# Altium PCB SmartKey_v2.PcbDoc
Units mm, origin at the board's own origin, x right, y up, seen from the top; angles counter-clockwise.
Board outline 60 x 60 mm, 2 copper layers (Top Layer, Bottom Layer); 43 components, 22 nets, 125 pads, 92 vias.
Unrouted connection lines stored in the file: 24.
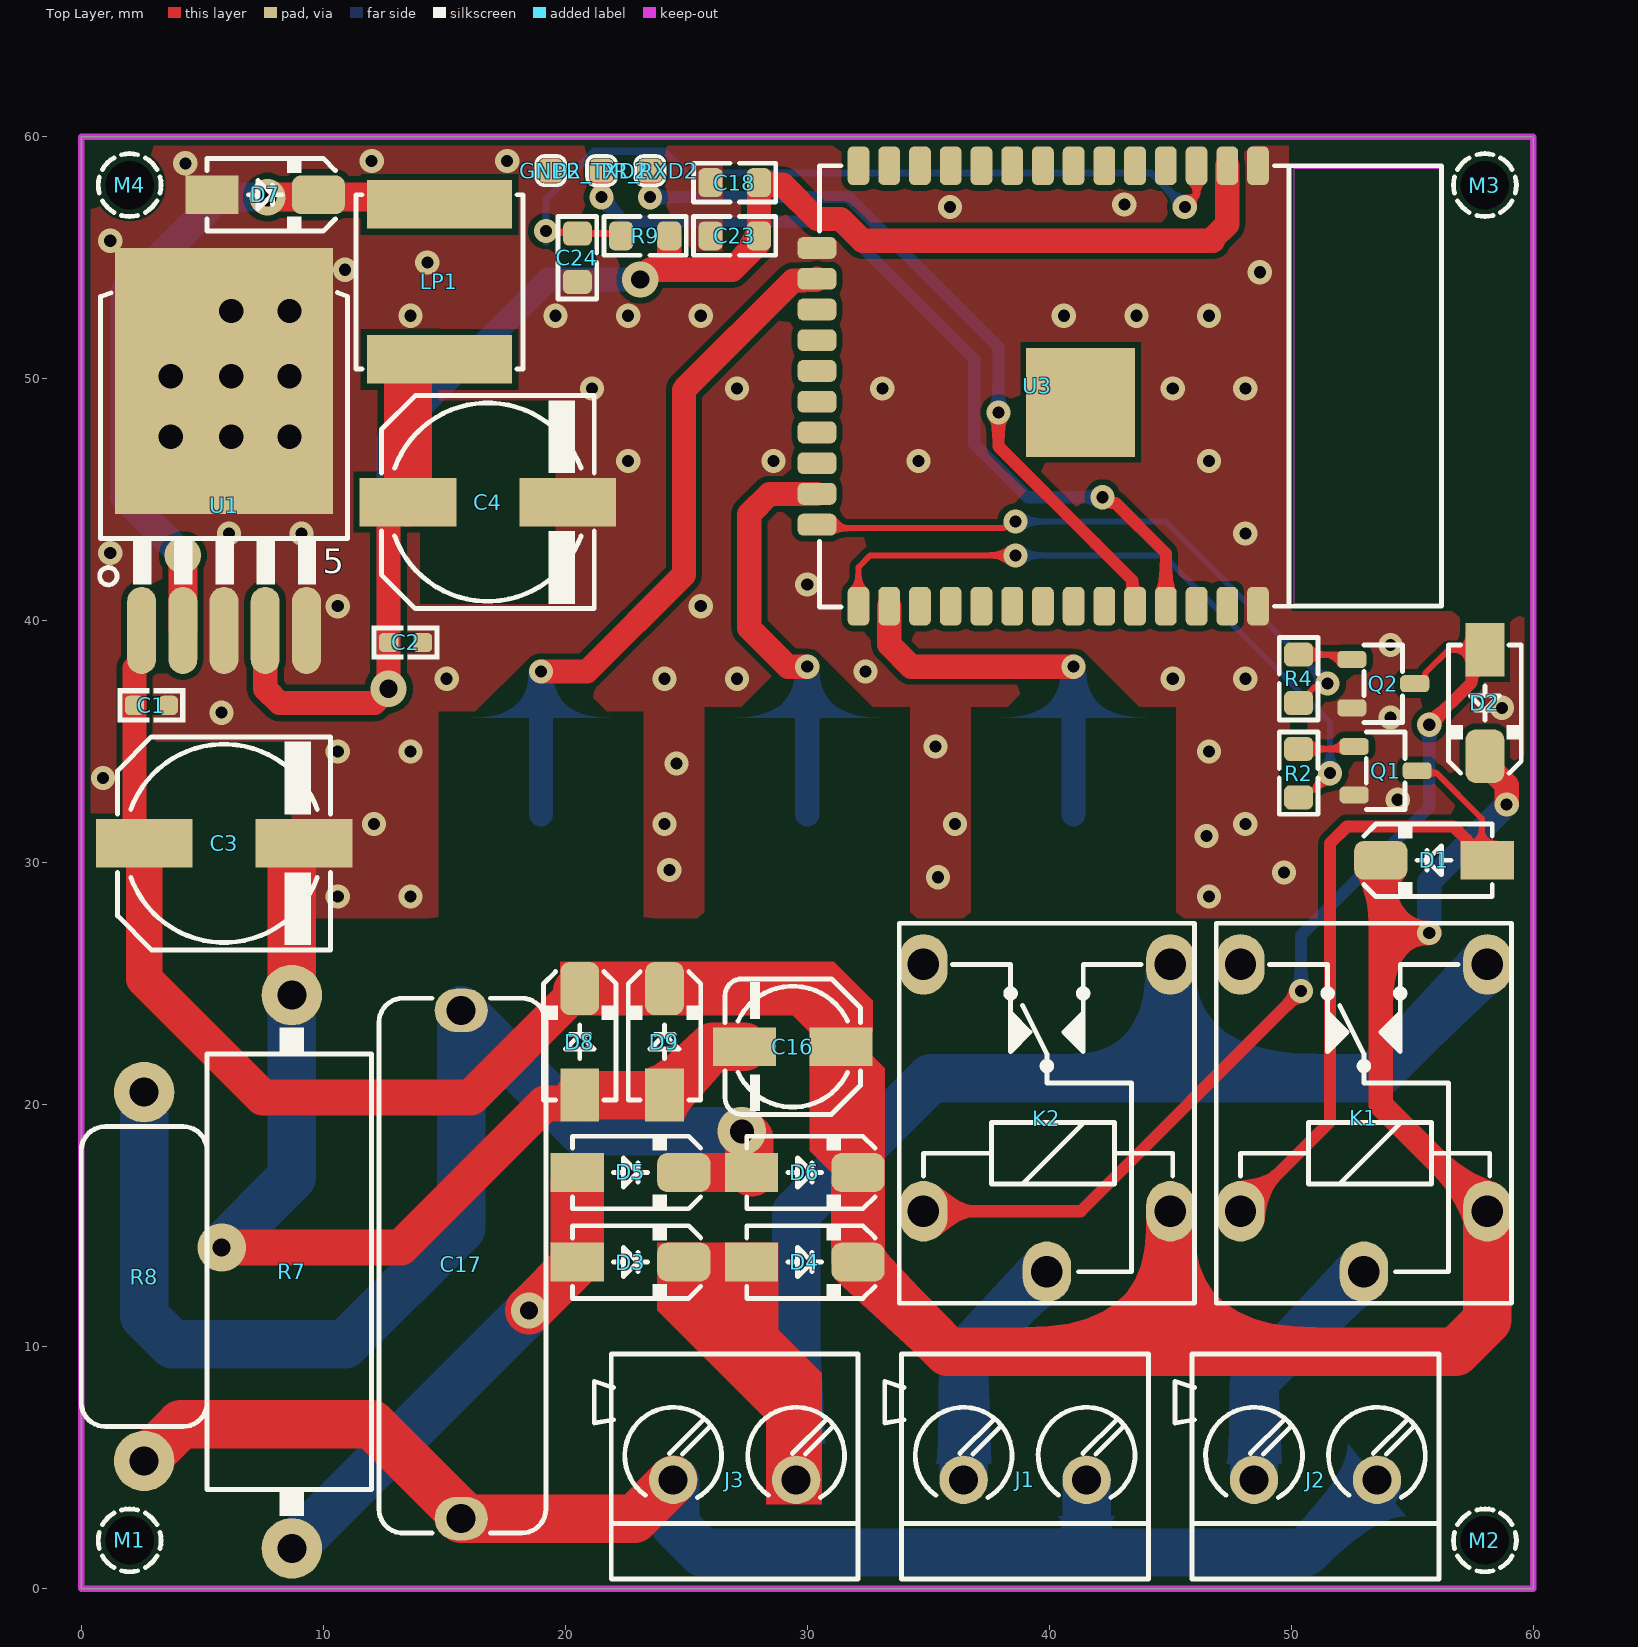
[diagram p0: Top Layer view]
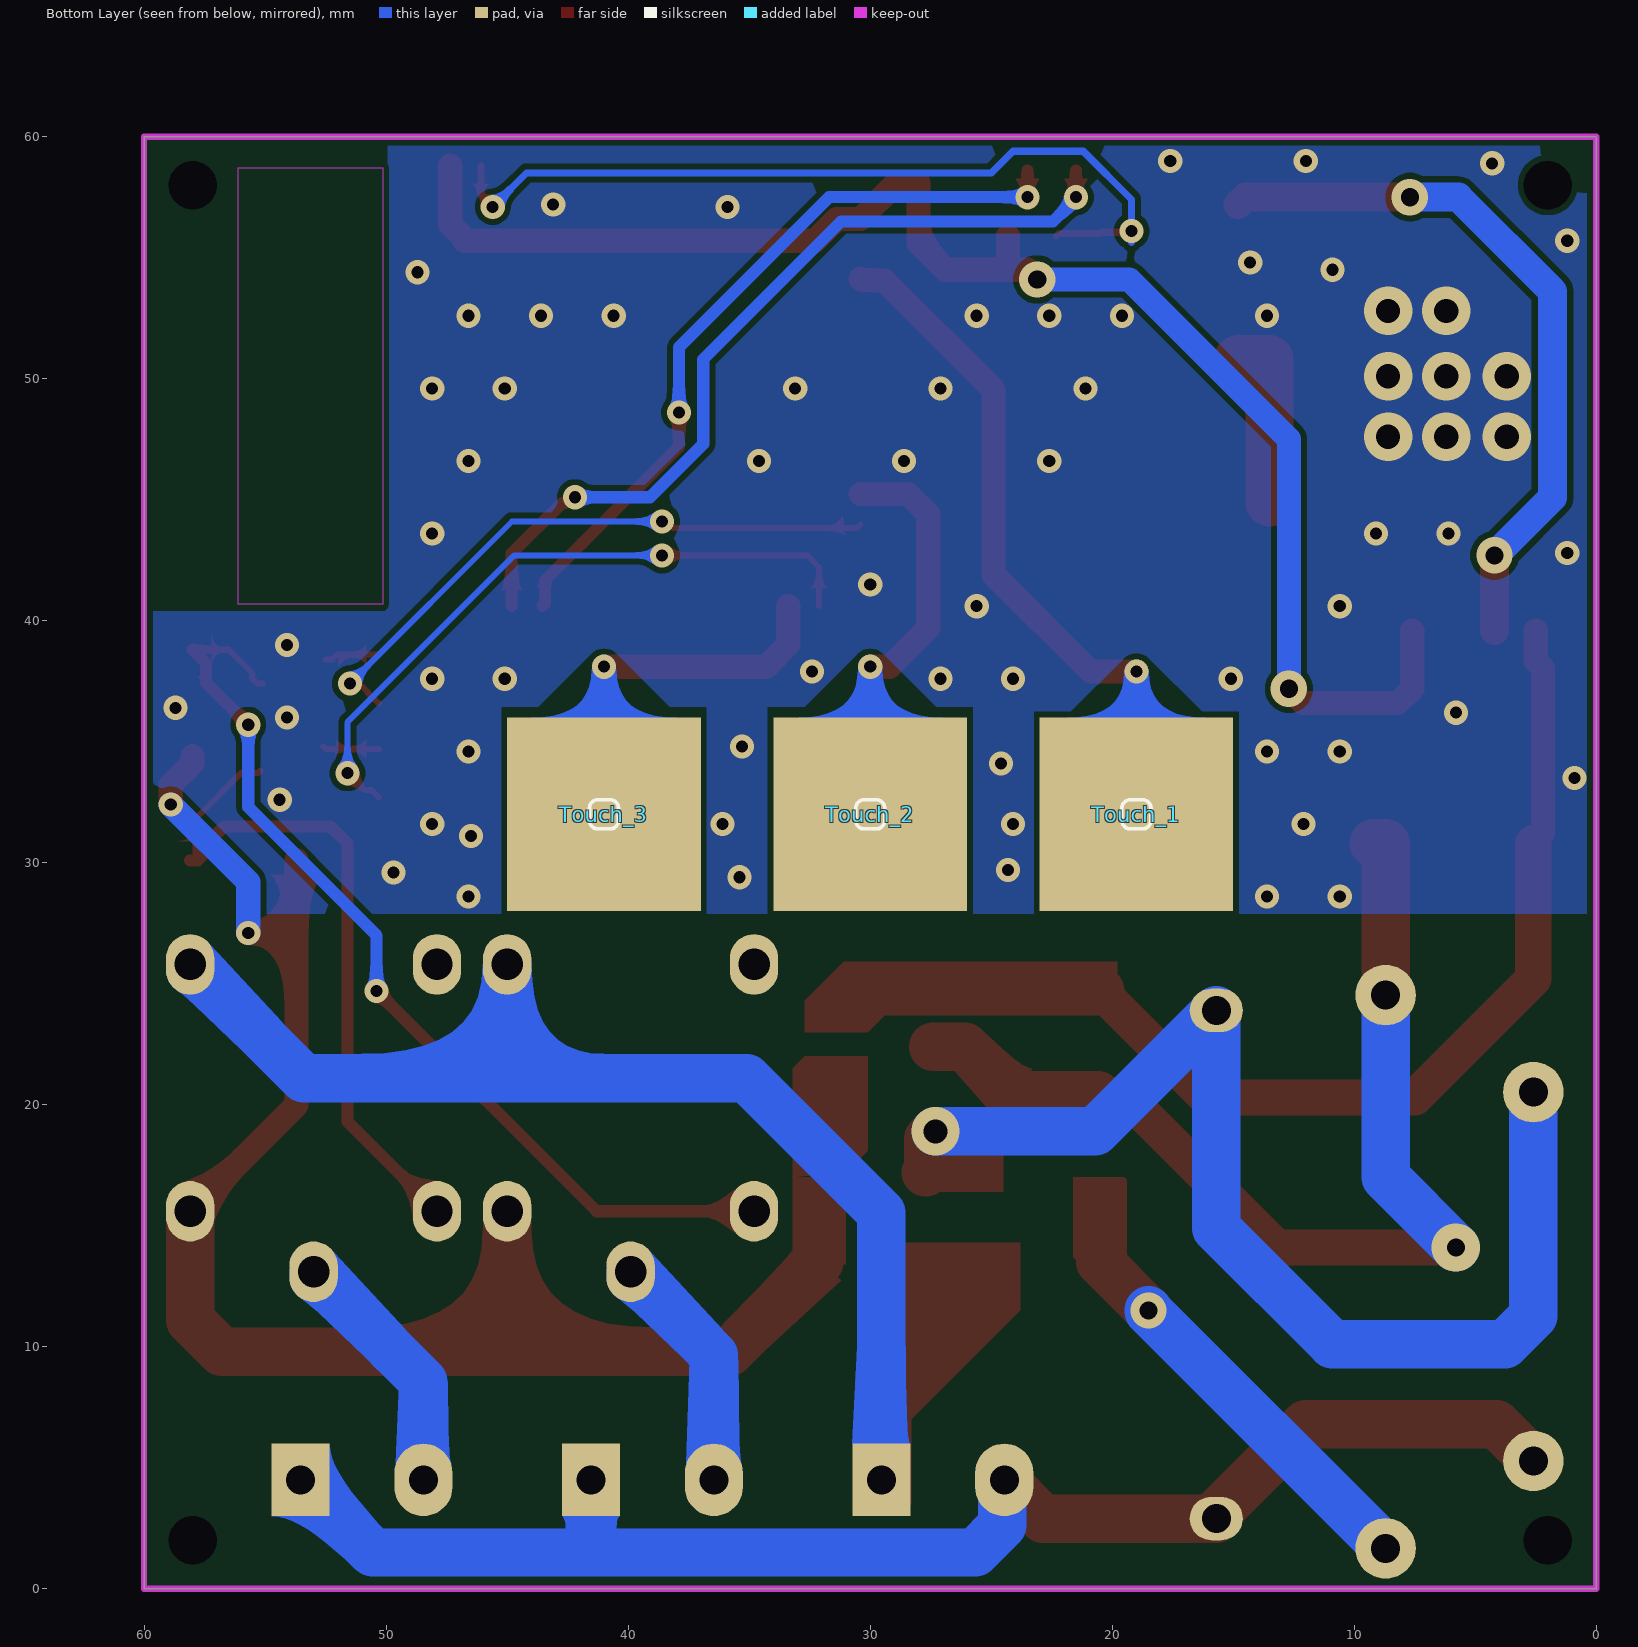
[diagram p1: Bottom Layer view, seen from below]
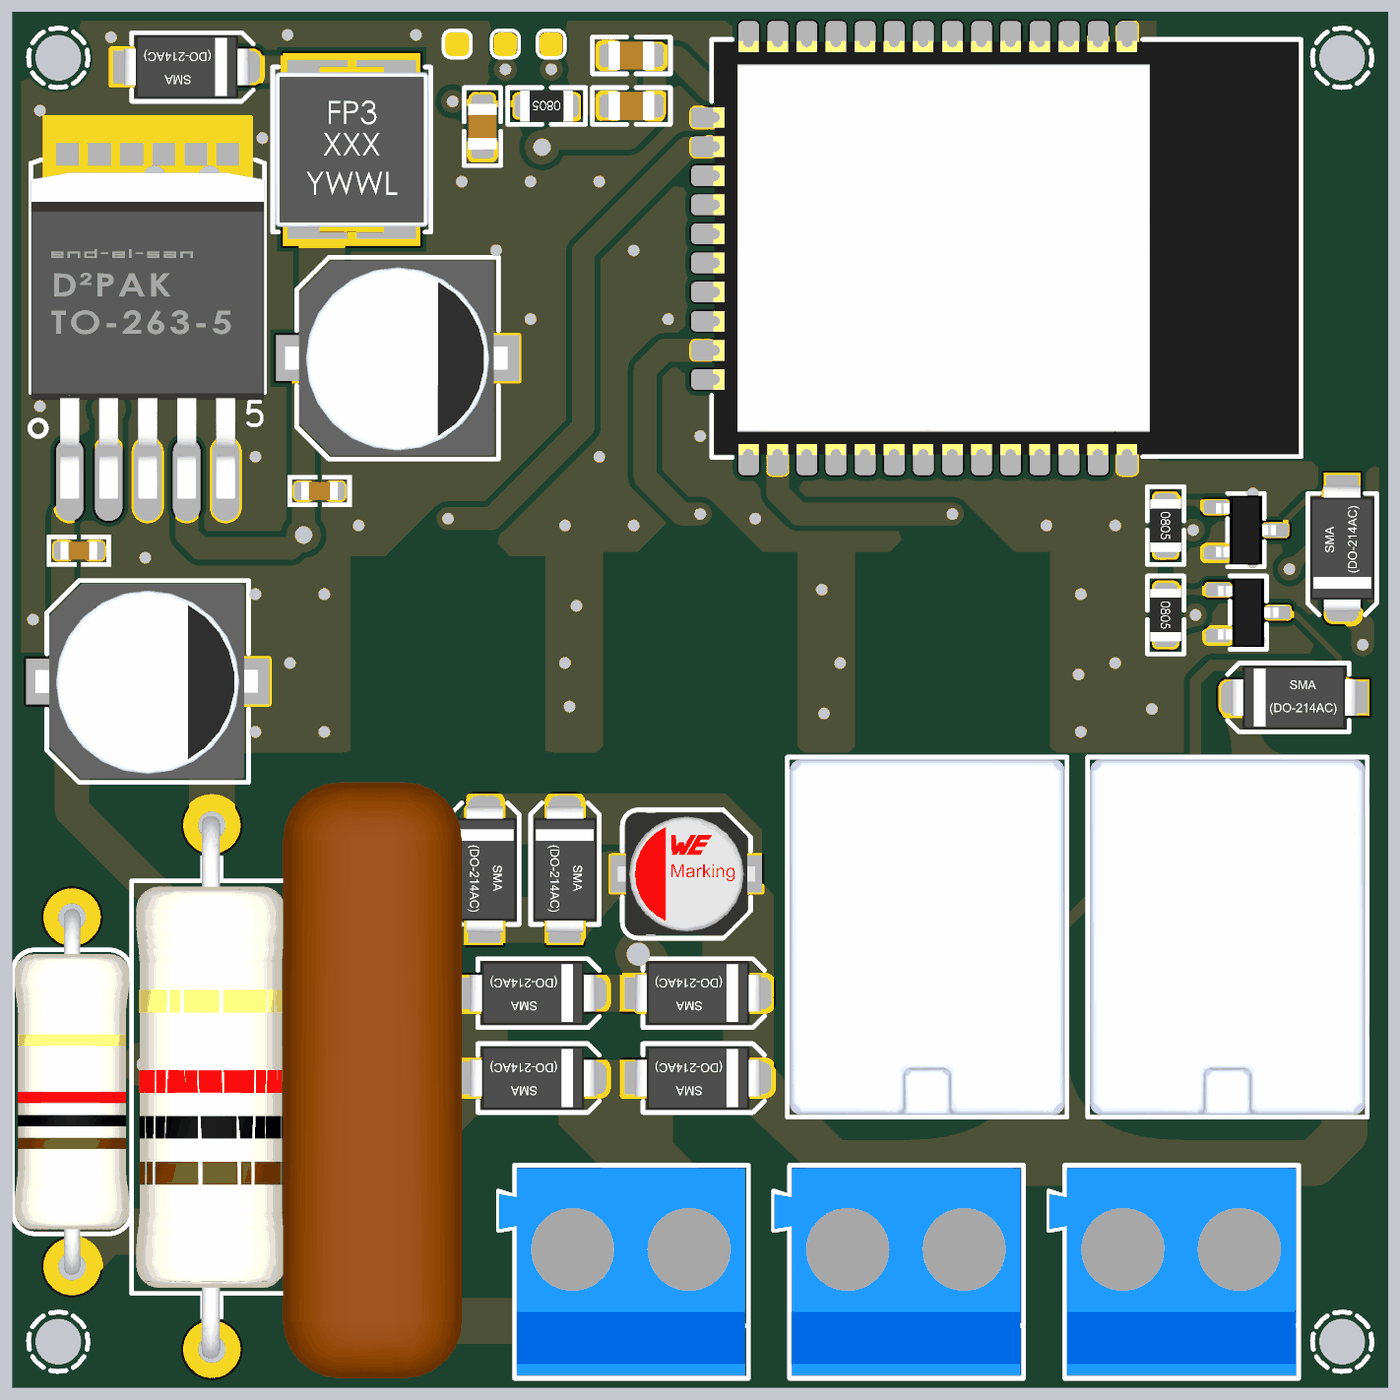
[diagram p2: 3D render of the assembled board from above, using the file's embedded part models]

## Layer stack, top to bottom
Top Solder: solder mask 0.0102, Solder Resist, Dk 3.5
Top Layer: signal copper 0.0356
Dielectric 1: dielectric 0.32, FR-4, Dk 4.8
Bottom Layer: signal copper 0.0356
Bottom Solder: solder mask 0.0102, Solder Resist, Dk 3.5

## Board outline
0,0 60,0 60,60 0,60

## Design rules (kind name [scope] priority, off if disabled: settings)
Clearance [All] p1: gap=0.25 ignorepadtopadclearanceinfootprint=FALSE
DiffPairsRouting [All] p1: maxlimit=0.3 minlimit=0.2 mostfreqgap=0.3 toplayer_minwidth=0.2 toplayer_maxwidth=0.3 toplayer_prefwidth=0.3 bottomlayer_minwidth=0.2 bottomlayer_maxwidth=0.3 bottomlayer_prefwidth=0.3 maxuncoupledlength=12.7
HoleSize [All] p1: absolutevalues=TRUE maxlimit=10 minlimit=0.5 maxpercent=80.000 minpercent=20.000
HoleToHoleClearance [All] p1: gap=0.3 allowstackedmicrovias=TRUE
PlaneClearance [All] p1: clearance=0.3
PlaneConnect [All] p1: pad.planeconnectstyle=Relief pad.reliefexpansion=0.5 pad.reliefentries=4 pad.reliefconductorwidth=0.4 pad.reliefairgap=0.3 via.planeconnectstyle=Direct via.reliefexpansion=0.5 via.reliefentries=4 via.reliefconductorwidth=0.4 via.reliefairgap=0.3
PolygonConnect PolygonConnect_Via [All vs IsVia] p1: connectstyle=Direct reliefconductorwidth=0.254 reliefentries=4 polygonreliefangle="90 Angle" airgapwidth=0.254
PolygonConnect PolygonConnect_Pad [All] p2: thpad.connectstyle=Relief thpad.reliefconductorwidth=0.4 thpad.reliefentries=4 thpad.polygonreliefangle="90 Angle" thpad.airgapwidth=0.3 smdpad.connectstyle=Direct smdpad.reliefconductorwidth=0.4 smdpad.reliefentries=4 smdpad.polygonreliefangle="90 Angle" smdpad.airgapwidth=0.3 via.connectstyle=Relief via.reliefconductorwidth=0.4 via.reliefentries=4 via.polygonreliefangle="90 Angle" via.airgapwidth=0.3
RoutingVias [All] p1: holewidth=0.5 width=1 viastyle="Through Hole" minholewidth=0.5 minwidth=1 maxholewidth=5 maxwidth=10
SolderMaskExpansion [All] p1: expansion=0.102 istentingtop=FALSE
Width [All] p1: maxlimit=10 minlimit=0.25 preferedwidth=0.25
25 further rules are at their usual default settings.

## Components (designator, comment, footprint, x,y, rotation, side; value= is the part's Value field where it differs from the comment)
C1 "100nF" C0603 2.9,36.5 r0 top
C2 "100nF" C0603 13.4,39.1 r0 top
C3 "470uF" C_EL_8 5.9,30.8 r0 top
C4 "470uF" C_EL_8 16.8,44.9 r0 top
C16 "47uF" C_EL_5 29.4,22.4 r180 top
C17 "1uF/400V" C_PLY_22X7 15.7,13.4 r90 top
C18 "10uF" C0805 27,58.1 r0 top
C23 "10uF" C0805 27,55.9 r0 top
C24 "1uF" C0805 20.5,55 r270 top
D1 "1N4007" D_SMA 55.9,30.1 r180 top
D2 "1N4007" D_SMA 58,36.6 r270 top
D3 "1N4007" D_SMA 22.7,13.5 r0 top
D4 "1N4007" D_SMA 29.9,13.5 r0 top
D5 "1N4007" D_SMA 22.7,17.2 r0 top
D6 "1N4007" D_SMA 29.9,17.2 r0 top
D7 "1N5822" D_SMA 7.6,57.6 r0 top
D8 "ZENER24V0" D_SMA 20.6,22.6 r90 top
D9 "ZENER24V0" D_SMA 24.1,22.6 r90 top
GND2 "TESTPOINT_SMD" TPSMD_S1#1 19.4,58.6 r90 top value=VALUE
J1 "CONN_TB2" TBB_2 39,4.5 r180 top locked
J2 "CONN_TB2" TBB_2 51,4.5 r180 top locked
J3 "CONN_TB2" TBB_2 27,4.5 r180 top locked
K1 "RELAY_SPDT" REL_SPDT_5_1512 53,15.6 r180 top
K2 "RELAY_SPDT" REL_SPDT_5_1512 39.9,15.6 r180 top
LP1 "3.3uH" L_7 14.8,54 r270 top
M1 "DNP/MH" PSPMH2 2,2 r0 top locked
M2 "DNP/MH" PSPMH2 58,2 r0 top locked
M3 "DNP/MH" PSPMH2 58,58 r0 top locked
M4 "DNP/MH" PSPMH2 2,58 r0 top locked
PR_RXD2 "TESTPOINT_SMD" TPSMD_S1#1 23.5,58.6 r90 top value=VALUE
PR_TXD2 "TESTPOINT_SMD" TPSMD_S1#1 21.5,58.6 r90 top value=VALUE
Q1 "C945" SOT23_3 53.9,33.8 r0 top
Q2 "C945" SOT23_3 53.8,37.4 r0 top
R2 "1K" R0805 50.3,33.7 r270 top
R4 "1K" R0805 50.3,37.6 r270 top
R7 "68R" R3W_AX09 8.7,13.1 r270 top
R8 "1M/1W" R1W_AX06 2.6,12.9 r90 top
R9 "10K" R0805 23.3,55.9 r180 top
Touch_1 "TESTPOINT_SMD" TPSMD_S1#2 19,32 r90 bottom value=VALUE
Touch_2 "TESTPOINT_SMD" TPSMD_S1#2 30,32 r90 bottom value=VALUE
Touch_3 "TESTPOINT_SMD" TPSMD_S1#2 41,32 r90 bottom value=VALUE
U1 "LM2596HVS" D2PAK_5 5.9,39.6 r0 top
U3 "ESP32-WROOM-32E" ESP32S 39.5,49.7 r270 top

## Footprints (in the part's own frame and the unit in brackets; to place one, negate y for a bottom-side part, rotate by r counter-clockwise, add the part's x,y. Pads: shape width x height; smd on the part's side, far side on the other; paste and mask are expansions set on the pad)
C0603 [mm] "CHIP Capacitor, 1.6X0.8mm, 0603 OPTIMIZED"
  rrect50% 0.8x0.8 smd mask+0.075: 1(-0.7,0) 2(0.7,0)
  Top Layer pour cut-out: -0.5,0.4 0.5,0.4 0.5,-0.4 -0.5,-0.4
  silkscreen extent -1.4,-0.7 1.4,0.7, body extent -0.8,-0.4 0.8,0.4, height 0.9
C0805 [mm] "CHIP Capacitor, 2.0X1.3mm, 0805"
  rrect50% 1x1.2 smd paste-0.1 mask+0.075: 1(-1,0) 2(1,0)
  Top Layer pour cut-out: -0.5,0.8 0.5,0.8 0.5,-0.8 -0.5,-0.8
  silkscreen extent -1.7,-0.8 1.7,0.8, body extent -1,-0.62 1,0.63, height 1
C_EL_5 [mm] "Electrolytic Cap, D: 5.0mm, L: 5.8mm, Size C"
  rect 2.6x1.6 smd: 1(-2,0) 2(2,0)
  Top Layer pour cut-out: 1.905,2.667 1.905,-2.7 -1.905,-2.7 -1.905,2.667
  silkscreen extent -2.8,-2.8 2.8,2.8, body extent -3,-2.65 3,2.65
C_EL_8 [mm] "Electrolytic Cap, Size E, Size F, 8.3X10"
  rect 4x2 smd: 1(-3.3,0) 2(3.3,0)
  Top Layer pour cut-out: 2.794,4.191 2.794,-4.191 -2.794,-4.191 -2.794,4.191
  silkscreen extent -4.4,-4.4 4.4,4.4, body extent -4.9,-4.25 4.8,4.25, height 10.3
C_PLY_22X7 [mm] "CAP, POLYESTER, 33.0X7.0mm pitch: 20.0mm, 0.68uF 400V"
  oval 1.8x2.2 hole 1.2: 1(-10.5,0) 2(10.5,0)
  silkscreen extent -11.1,-3.5 11,3.4, body extent -13,-3.9 13,3.9, height 19
D2PAK_5 [mm] "TO-263-5L, D2PAK-5, DDPAK, FMG170_5_S1000"
  oval 1.2x3.6 smd: 1(-3.404,0) 2(-1.702,0) 3(0,0) 4(1.702,0) 5(3.404,0)
  rect 9x11 smd paste-6: 6(0,10.3)
  silkscreen extent -5.14,1.88 5.1,13.96, body extent -5.08,-0.84 5.08,13.39, height 4.87
D_SMA [mm] "SMA Molded Diode, 2-Leads, Body 4.3x2.7mm, SOD-128"
  rect 2.2x1.6 smd paste-0.1: 1(-2.2,0)
  rrect50% 2.2x1.6 smd paste-0.1: 2(2.2,0)
  silkscreen extent -2.4,-1.5 2.9,1.5, body extent -2.75,-1.4 2.75,1.4, height 2.6
ESP32S [mm] "ESP-32S, ESP32­WROOM­32E"
  rrect50% 1.6x0.9 smd mask+0.075: 1(-9.1,9.125) 2(-9.1,7.855) 3(-9.1,6.585) 4(-9.1,5.315) 5(-9.1,4.045) 6(-9.1,2.775) 7(-9.1,1.505) 8(-9.1,0.235) 9(-9.1,-1.035) 10(-9.1,-2.305) 11(-9.1,-3.575) 12(-9.1,-4.845) 13(-9.1,-6.115) 14(-9.1,-7.385) 25(9.1,-7.385) 26(9.1,-6.115) 27(9.1,-4.845) 28(9.1,-3.575) 29(9.1,-2.305) 30(9.1,-1.035) 31(9.1,0.235) 32(9.1,1.505) 33(9.1,2.775) 34(9.1,4.045) 35(9.1,5.315) 36(9.1,6.585) 37(9.1,7.855) 38(9.1,9.125)
  rrect50% 0.9x1.6 smd mask+0.075: 15(-5.7,-9.1) 16(-4.43,-9.1) 17(-3.16,-9.1) 18(-1.89,-9.1) 19(-0.62,-9.1) 20(0.65,-9.1) 21(1.92,-9.1) 22(3.19,-9.1) 23(4.46,-9.1) 24(5.73,-9.1)
  rect 4.5x4.5 smd: GND(0.68,1.795)
  Top Layer pour cut-out: -9.1,16.7 9.1,16.7 9.1,10.4 -9.1,10.4
  Keep-Out Layer region: 9,10.625 -9,10.625 -9,16.625 9,16.625
  Keep-Out Layer region: 9,10.625 -9,10.625 -9,16.625 9,16.625
  silkscreen extent -9.1,-9 9.13,16.7, body extent -9.04,-8.93 9.04,16.61, height 3
L_7 [mm] "INDUCTOR, 7.2X6.9mm, 7.1X6.5mm, SPM6530"
  rect 2x6 smd paste-3: 1(-3.2,0) 2(3.2,0)
  silkscreen extent -3.6,-3.45 3.6,3.45, body extent -3.62,-3.35 3.63,3.35, height 3
PSPMH2 [mm] "Plastic Spacer mouting, Hole 2mm"
  round 0 hole 2 unplated mask+0.1: ""(0,0)
  Top Layer pour cut-out: 0,1.5 -0.574,1.386 -1.061,1.061 -1.386,0.574 -1.5,0 -1.5,0 -1.386,-0.574 -1.061,-1.061 -0.574,-1.386 0,-1.5 0,-1.5 0.75,-1.299 1.299,-0.75 1.5,0 1.5,0 1.386,0.574 1.061,1.061 0.574,1.386 0,1.5
  silkscreen extent -1.3,-1.3 1.3,1.3
R1W_AX06 [mm] "RESISTOR 1 WATT, AXIAL0.6"
  round 2.5 hole 1.2: 1(-7.62,0) 2(7.62,0)
  silkscreen extent -6.2,-2.6 6.2,2.6, body extent -7.97,-2.49 7.97,2.51, height 5
R3W_AX09 [mm] "RESISTOR 3 WATT, AXIAL0.9"
  round 2.5 hole 1.2: 1(-11.43,0) 2(11.43,0)
  silkscreen extent -10.1,-3.5 10.1,3.3, body extent -11.83,-3.3 11.83,3.2, height 6.5
R0805 [mm] "CHIP RESISTOR 1/8 WATT ,2.0X1.3mm, 0805, 2012"
  rrect50% 1x1.2 smd paste-0.1 mask+0.075: 1(-1,0) 2(1,0)
  Top Layer pour cut-out: -0.5,0.8 0.5,0.8 0.5,-0.8 -0.5,-0.8
  silkscreen extent -1.7,-0.8 1.7,0.8, body extent -1.15,-0.67 1.15,0.68, height 0.76
REL_SPDT_5_1512 [mm] "RELAY, SPDT, 15.40x12.10x14.0mm, G8QN, SUN HOLD RAM"
  oval 2x2.5 hole 1.3: 1(0,2.5) 2(5.1,-10.2) 3(-5.1,-10.2) 4(-5.1,0) 5(5.1,0)
  silkscreen extent -6.1,-11.9 6.1,3.8, body extent -6,-11.8 6,3.7, height 14
SOT23_3 [mm] "SOT-23, Micro3, MO-178, TO-236AB, MO-193C, SuperSOT3, SC-59, 1.5x3mm, Pitch 1.9mm"
  rrect50% 1.2x0.7 smd paste-0.05 mask+0.1: 1(-1.3,1) 2(-1.3,-1) 3(1.3,0)
  silkscreen extent -0.8,-1.6 0.8,1.6, body extent -1.32,-1.5 1.32,1.5, height 1.08
TBB_2 [mm] "Terminal Block Blue"
  round 2 / inner round 2 / far side rect 2.4x3 hole 1.2: 1(-2.54,0)
  round 2 / inner round 2 / far side oval 2.4x3 hole 1.2: 2(2.54,0)
  silkscreen extent -5.1,-5.2 5.8,4.1, body extent -4.96,-5.08 5.78,3.99, height 12.52
TPSMD_S1#1 [mm] "Test Point, SMD Pad, Circle, 1mm X 1mm"
  rrect50% 1x1 smd paste-1.016 mask+0.025: 1(0,0)
  silkscreen extent -0.6,-0.6 0.6,0.6
TPSMD_S1#2 [mm] "Test Point, SMD Pad, Circle, 1mm X 1mm"
  rect 8x8 smd paste-1.016 mask+0.025: 1(0,0)
  silkscreen extent -0.6,-0.6 0.6,0.6

## Part data
C1 C2: library part CAP_SMD_MLCC_0805, "CAP, MLCC, -F, -V, MATERIAL, -%, 0201", ASSEMBLY=ASSEMBLY, MANF=-, MANF_P#=MANF_PART#, PARAM="-, -%", PARAM2=-V, PRICE="100= 1$"
C3 C4 C16: library part CAP_SMD_EL, "CAP, THD, ELEC,", ASSEMBLY=ASSEMBLY, DESC=DESCRIPTION, DIST#=MOUSER, MANF=MANF, MANF_P#=MANF_PART#, PARAM=20%, PARAM2=-V, PRICE="10= -$"
C17: library part CAP_THD_FILM_POLYESTER, "CAP, FILM,", ASSEMBLY=ASSEMBLY, DESC="CAP, FILM,", MANF=MANF, MANF_P#=MANF_PART#, PARAM2=400V, PRICE="100= 1$"
C18 C23 C24: library part CAP_SMD_MLCC_0603, "CAP, MLCC, -F, -V, MATERIAL, -%, 0201", ASSEMBLY=ASSEMBLY, MANF=-, MANF_P#=MANF_PART#, PARAM="-, -%", PARAM2=-V, PRICE="100= 1$"
D1 D2 D3 D4 D5 D6: library part DIODE_SMD_1N4007, "DIODE, GENERAL PURPOSE, 1000V/1A", ASSEMBLY=ASSEMBLY, DESC=DESCRIPTION, MANF=Kingtronics, MANF_P#=M7, PARAM="1000V VRRM", PARAM2=1A, PRICE=PRICE
D7: library part DIODE_SMD_SCHOTTKY_1N5822, "DIODE, SCHOTTKY, 40V, 3A", ASSEMBLY=ASSEMBLY, DESC=DESCRIPTION, MANF=DIODES, MANF_P#=1N5822, PARAM=40V, PARAM2=3A, PRICE=PRICE
D8 D9: library part DIODE_SMD_ZENER_SMAZ5V6, "DIODE, ZENER, 1W, 5.6V", ASSEMBLY=ASSEMBLY, DESC=DESCRIPTION, MANF=Diodes, MANF_P#=SMAZ5V6-13-F, PARAM=5.6V, PARAM2="1W, 2Ohm, -55~150oC", PRICE=0.5$
GND2 PR_RXD2 PR_TXD2 Touch_1 Touch_2 Touch_3: "TEST POINT", MANF=MANF, MANF_P#=MANF_P#
J1 J2 J3: "CONN, TERMINAL BLOCK, 5.08mm pitch"
K1 K2: library part RELAY_SPST_5_1512_G8QN, "Relay, SPDT, 5P, 15.4X12.1mm, 16V/30A", MANF=OMRON, MANF_P#=G8QN, PARAM="12V, 50mA", PARAM2="16VDC, 30A", PRICE=PRICE
LP1: library part IND_SMD_3.3uH_8A, "INDUCTOR, 3.3uH, 8A (Irms), 10mOhm", ASSEMBLY=ASSEMBLY, DESC="INDUCTOR, 3.3uH, 8A (Irms), 10mOhm", MANF=Bourns, MANF_P#=SRP7050TA-3R3M, PARAM="8A (Irms), 12A Isat", PARAM2=10mOhm, PRICE=1.3$
M1 M2 M3 M4: library part PSPMH2, "Plastic Spacer mouting, Hole 2mm", ASSEMBLY=DNP
Q1 Q2: library part NPN_C945_SMD, "BJT, NPN, 50v, 0.15A, THD, TO92, BC945", MANF=-, MANF_P#="C945, 2SC945, BC945", PARAM="50v, 0.15A", PARAM2=200mW
R2 R4 R9: library part RES_SMD_0603, "RESISTOR, SMD", ASSEMBLY=ASSEMBLY, DESC=DESCRIPTION, DIST#=MOUSER, MANF=-, MANF_P#=-, PARAM=-W, PARAM2=1%, PRICE="100= 0.5$"
R7 R8: library part RES_THD, "RESISTOR, THD", ASSEMBLY=ASSEMBLY, DESC=DESCRIPTION, DIST#=MOUSER, MANF="KOA SPEER", MANF_P#=RK73H1ETTP4701F, PARAM=0.063W, PARAM2=1%, PRICE="100= 0.5$"
U3: "WiFi with Bluetooth 4.0", MANF_P#=ESP32-WROOM-32E

## Via types
v1: diameter 1, hole 0.5, Top Layer to Bottom Layer, tented both sides, 77 vias
v2: diameter 2, hole 1, Top Layer to Bottom Layer, tented both sides, 9 vias
v3: diameter 1.5, hole 0.75, Top Layer to Bottom Layer, tented both sides, 5 vias
v4: diameter 2, hole 0.75, Top Layer to Bottom Layer, tented both sides, 1 vias

## Nets (pads, with @x,y where several pads share a name; then routed paths per layer and width w, separated by ;. In a path a pad name is that pad's centre, name@x,y a point inside that pad or via, vN(x,y) a via of type N, cw(c..) or ccw(c..) an arc to the next point about the centre after c; other vN are vias at no path point)
+3V3: C2.1 C4.1 C18.2 C23.2 LP1.2 R9.1 U1.4 U3.2 | length 79.3
  Top Layer w1: U1.4 7.602,37.186 8.188,36.6 12.114,36.6 v3(12.7,37.186) C2.1 12.7,44.4 13.2,44.9 C4.1 ; v3(23.1,54.1) 23.5,54.5 24.3,54.5 ; R9.1 24.3,54.5 ; 46.769,55.7 32.279,55.7 31.379,56.6 30.4,56.6 28.987,58.013 28,58.013 C18.2 C23.2 28,55.6 26.9,54.5 24.3,54.5 ; 46.769,55.8 47.355,56.386 U3.2
  Top Layer w2: C4.1 13.5,50.8 LP1.2
  Bottom Layer w1: v3(12.7,37.186) 12.7,47.5 19.3,54.1 v3(23.1,54.1)
+24V0: C1.1 C3.1 C16.1 D1.2 D2.2 D4.2 D6.2 D8.2 D9.2 K1.4 K2.4 U1.1 | length 102.6
  Top Layer w1: U1.1 2.496,38.346 2.2,38.049 2.2,31.2 C3.1 ; D1.2 53.7,27.1 ; v1(55.7,27.1) 53.7,27.1 ; D2.2 58,34.1 58.3,33.8 58.314,33.8 58.9,33.214 v1(58.9,32.4) ; K1.4 53.7,20 53.7,27.1
  Top Layer w1.5: C3.1 2.6,25.2 7.5,20.3 16.1,20.3 20.25,24.45 20.55,24.45 20.6,24.5 D8.2
  Top Layer w2: D8.2@20.5,24.7 D8.2 ; D4.2 35.8,9.8 45,9.8 ; K2.4 45,9.8 ; K1.4 58.1,11.1 56.8,9.8 45,9.8
  Bottom Layer w1: v1(55.7,27.1) 55.7,29.2 v1(58.9,32.4)
GND: C1.2 C2.2 C3.2 C4.2 C16.2 C18.1 C23.1 C24.2 D7.1 D8.1 D9.1 GND2.1 Q1.2 Q2.2 R7.1 U1.3 U1.5 U1.6 U3.1 U3.15 U3.38 | length 43.6
  Top Layer w1.5: v4(5.8,14.1) 13.2,14.1 19.15,20.05 20.55,20.05 20.6,20.1 D8.1
  Top Layer w2: R7.1 8.7,30.8 C3.2 ; D8.1 D9.1 26.1,22.4 C16.2
  Bottom Layer w2: v4(5.8,14.1) 8.7,17 R7.1
  other v1: 10.6,28.6 13.6,28.6 46.6,28.6 35.4,29.4 49.7,29.6 24.3,29.7 46.5,31.1 12.1,31.6 24.1,31.6 36.1,31.6 48.1,31.6 54.4,32.6 0.9,33.5 24.6,34.1 10.6,34.6 13.6,34.6 46.6,34.6 35.3,34.8 54.1,36 5.8,36.2 58.7,36.4 15.1,37.6 24.1,37.6 27.1,37.6 45.1,37.6 48.1,37.6 32.4,37.9 54.1,39 10.6,40.6 25.6,40.6 30,41.5 1.2,42.8 6.1,43.6 9.1,43.6 48.1,43.6 22.6,46.6 28.6,46.6 34.6,46.6 46.6,46.6 21.1,49.6 27.1,49.6 33.1,49.6 45.1,49.6 48.1,49.6 13.6,52.6 19.6,52.6 22.6,52.6 25.6,52.6 40.6,52.6 43.6,52.6 46.6,52.6 48.7,54.4 10.9,54.5 14.3,54.8 1.2,55.7 35.9,57.1 43.1,57.2 4.3,58.9 12,59 17.6,59
  other v2: 3.7,47.6 6.2,47.6 8.6,47.6 3.7,50.1 6.2,50.1 8.6,50.1 6.2,52.8 8.6,52.8
NetC17_2: C17.2 D5.2 D6.1 R8.2 | length 49.4
  Top Layer w2: v2(27.3,18.9) 27.6,18.6 27.6,17.3 D6.1
  Bottom Layer w2: R8.2 2.6,11.272 3.772,10.1 10.9,10.1 15.7,14.9 C17.2 20.7,18.9 v2(27.3,18.9)
NetC24_1: C24.1 R9.2 U3.3 | length 35
  Top Layer w0.3: v1(19.2,56.1) 19.25,56.05 20.45,56.05 C24.1 22.2,56 R9.2 ; v1(45.6,57.1) 45.6,57.114 46.085,57.599 U3.3
  Bottom Layer w0.3: v1@19.2,55.636 19.2,57.4 21.2,59.4 24.1,59.4 25,58.5 44.2,58.5 v1(45.6,57.1)
NetD1_1: D1.1 K1.5 Q1.3 | length 29.3
  Top Layer w0.25: Q1.3 55.289,33.711 55.989,33.711 57.871,31.829 D1.1@57.871,30.329
  Top Layer w0.5: K1.5 51.6,19.3 51.6,30.8 52.3,31.5 56.7,31.5 57.25,30.95 57.25,30.65 57.8,30.1 D1.1
NetD2_1: D2.1 K2.5 Q2.3 | length 40.2
  Top Layer w0.25: Q2.3 55.318,37.4 55.539,37.621 55.539,37.839 56.5,38.8 D2.1
  Top Layer w0.5: K2.5 41.3,15.6 v1(50.4,24.7) ; v1(55.7,35.7) 57.45,37.45 57.45,38.25 D2.1
  Bottom Layer w0.5: v1(50.4,24.7) 50.4,27 55.7,32.3 v1(55.7,35.7)
NetD3_1: D3.1 D5.1 R7.2 | length 16.7
  Top Layer w2: v3(18.5,11.5) D3.1
  Bottom Layer w2: R7.2 18.5,11.47 v3(18.5,11.5)
NetD7_2: D7.2 LP1.1 U1.2 | length 29.7
  Top Layer w1.2: U1.2 4.198,42.698 v3(4.2,42.7) ; v3(7.7,57.5) 14.5,57.5 LP1.1
  Bottom Layer w1.2: v3(4.2,42.7) 1.8,45.1 1.8,53.6 5.7,57.5 v3(7.7,57.5)
NetJ1_2: J1.2 K2.1 | length 10.2
  Bottom Layer w2: J1.2 36.46,9.66 39.65,12.85 39.9,12.85 K2.1
NetJ2_2: J2.2 K1.1 | length 10.6
  Bottom Layer w2: J2.2 48.46,8.56 52.75,12.85 53,12.85 K1.1
NetPR_RXD2_1: PR_RXD2.1 U3.34 | length 31.1
  Top Layer w0.5: v1(23.5,57.5) PR_RXD2.1 ; v1(37.9,48.6) 37.9,47.2 41.9,43.2 43.433,41.667 43.433,40.712 U3.34
  Bottom Layer w0.5: v1(23.5,57.5) 31.7,57.5 37.9,51.3 v1(37.9,48.6)
NetPR_TXD2_1: PR_TXD2.1 U3.35 | length 34.8
  Top Layer w0.5: v1(21.5,57.5) PR_TXD2.1@21.5,58.6 ; v1(42.2,45.1) 42.335,45.1 42.569,44.866 42.734,44.866 44.815,42.785 U3.35
  Bottom Layer w0.5: v1(21.5,57.5) 21.5,57.439 22.439,56.5 31.2,56.5 36.9,50.8 36.9,47.3 39.1,45.1 v1(42.2,45.1)
NetQ1_1: Q1.1 R2.1 | length 2.3
  Top Layer w0.25: R2.1 52.5,34.7 Q1.1
NetQ2_1: Q2.1 R4.1 | length 2.3
  Top Layer w0.25: R4.1 52.023,38.6 52.223,38.4 Q2.1
Null: C17.1 J1.1 J2.1 J3.2 R8.1 | length 60.7
  Top Layer w2: R8.1 4.12,6.8 12,6.8 15.6,3.2 15.6,3 C17.1 22.86,2.9 J3.2
  Bottom Layer w2: J3.2 24.537,4.423 24.537,2.624 25.66,1.5 41.5,1.5 ; J1.1 41.54,1.54 41.5,1.5 ; J2.1 53.54,4.2 53.34,4 53.06,4 50.56,1.5 41.5,1.5
Phase: D3.2 D4.1 J3.1 K1.3 K2.3 | length 48.7
  Bottom Layer w2: J3.1 29.54,15.54 35.1,21.1 41,21.1 45,21.1 ; K2.3 45,21.1 ; K1.3 58.1,25.55 57.85,25.55 53.4,21.1 45,21.1
Relay_1: R2.2 U3.25 | length 28
  Top Layer w0.25: U3.25 32.115,42.215 32.6,42.7 v1(38.6,42.7) ; R2.2 50.598,32.998 50.898,32.998 v1(51.6,33.7)
  Bottom Layer w0.25: v1(38.6,42.7) 44.7,42.7 51.6,35.8 v1(51.6,33.7)
Relay_2: R4.2 U3.24 | length 25.6
  Top Layer w0.25: U3.24 30.545,43.825 38.122,43.825 38.397,44.1 v1(38.6,44.1) ; R4.2 50.332,36.6 50.775,37.043 50.775,37.075 50.956,37.256 51.356,37.256 v1(51.5,37.4)
  Bottom Layer w0.25: v1(38.6,44.1) 44.8,44.1 v1(51.5,37.4)
Touch_S1: Touch_1.1 U3.16 | length 28.5
  Top Layer w1: v1(19,37.9) 20.9,37.9 24.9,41.9 24.9,49.539 29.421,54.06 29.848,54.06 29.868,54.08 30.35,54.08 U3.16
  Bottom Layer w1: Touch_1.1 v1(19,37.9)
Touch_S2: Touch_2.1 U3.23 | length 17
  Top Layer w1: v1(30,38.1) 29.2,38.1 27.6,39.7 27.6,44.4 28.44,45.24 U3.23
  Bottom Layer w1: Touch_2.1 v1(30,38.1)
Touch_S3: Touch_3.1 U3.26 | length 15.7
  Top Layer w1: U3.26 33.385,39.015 34.3,38.1 v1(41,38.1)
  Bottom Layer w1: Touch_3.1 v1(41,38.1)
pads on no net: K1.2 K2.2 M1. M2. M3. M4. U3.4 U3.5 U3.6 U3.7 U3.8 U3.9 U3.10 U3.11 U3.12 U3.13 U3.14 U3.17 U3.18 U3.19 U3.20 U3.21 U3.22 U3.27 U3.28 U3.29 U3.30 U3.31 U3.32 U3.33 U3.36 U3.37 U3.GND

## Polygon pours and split planes (outlines as drawn)
GND on Top Layer "GND_L01_P000" (solid, remove dead copper, pour order 0): 0,27.8 0.1,27.7 60,27.7 60,60 0.1,60
GND on Bottom Layer "GND_L02_P001" (solid, remove dead copper, pour order 1): 0.1,27.9 60,27.9 60,60.1 59.8,59.9 -0.1,59.9

## Keep-outs
Keep-Out Layer:
  the board outline again, w0.254

## Other copper
Top Layer:
  pour cut-out: 38.122,43.825 38.122,44.422 39.3,45.6 43.2,41.7 42.9,41.7 42,40.8 37.9,40.8
  pour cut-out: 36.75,36.45 36.75,27.95 45.25,27.95 45.25,36.45 43.711,36.45 41.526,38.635 40.465,38.635 38.28,36.45
  pour cut-out: 25.75,36.45 25.75,27.95 34.25,27.95 34.25,36.45 32.711,36.45 30.526,38.635 29.465,38.635 27.28,36.45
  pour cut-out: 14.75,36.25 14.75,27.75 23.25,27.75 23.25,36.25 21.711,36.25 19.526,38.435 18.465,38.435 16.28,36.25
  pour cut-out: 49.9,59.9 49.9,40.565 50.065,40.4 61.9,40.4 61.9,59.9 61.6,60.2
  region net Phase: 23.8,14.3 23.8,11.5 28.3,7 28.3,3.5 30.6,3.5 30.6,8.9 28.8,10.7 28.8,14.3
  region net +24V0: 30.1,23 29.4,23.7 19.8,23.7 19.8,25.9 31.1,25.9 32.7,24.3 32.7,23
  region net +24V0: 31,17.2 30.1,18.1 30.1,22 32.7,22 33.2,21.5 33.2,17
  region net +24V0: 31,13.4 31,17 33.2,17 33.2,13.3
  region net NetC17_2: 27.5,18 24.5,18 24.5,16.4 27.5,16.4
  region net NetD3_1: 19.4,13.5 19.4,16.9 19.5,17 21.6,17 21.6,13.7 21.5,13.6
Bottom Layer:
  pour cut-out: 36.75,36.45 36.75,27.95 45.25,27.95 45.25,36.45 43.711,36.45 41.526,38.635 40.465,38.635 38.28,36.45
  pour cut-out: 25.75,36.45 25.75,27.95 34.25,27.95 34.25,36.45 32.711,36.45 30.526,38.635 29.465,38.635 27.28,36.45
  pour cut-out: 14.75,36.25 14.75,27.75 23.25,27.75 23.25,36.25 21.711,36.25 19.526,38.435 18.465,38.435 16.28,36.25
  pour cut-out: 50,60 49.945,59.945 49.945,40.52 50.065,40.4 62.1,40.4 62.1,62.7 62.6,63.2

## Text inside footprints (layer, text, board x,y; h text height)
U1: Top Overlay "5" at 9.989,41.967 h1.02